# Altium PCB TMS320F280049CPZS.PcbDoc
Units mil, origin at the board's own origin, x right, y up, seen from the top; angles counter-clockwise.
Board outline 1797 x 1626 mil, 4 copper layers (Top Layer, GND, VCC, Bottom Layer); 42 components, 84 nets, 272 pads, 2 vias.
Unrouted connection lines stored in the file: 166.
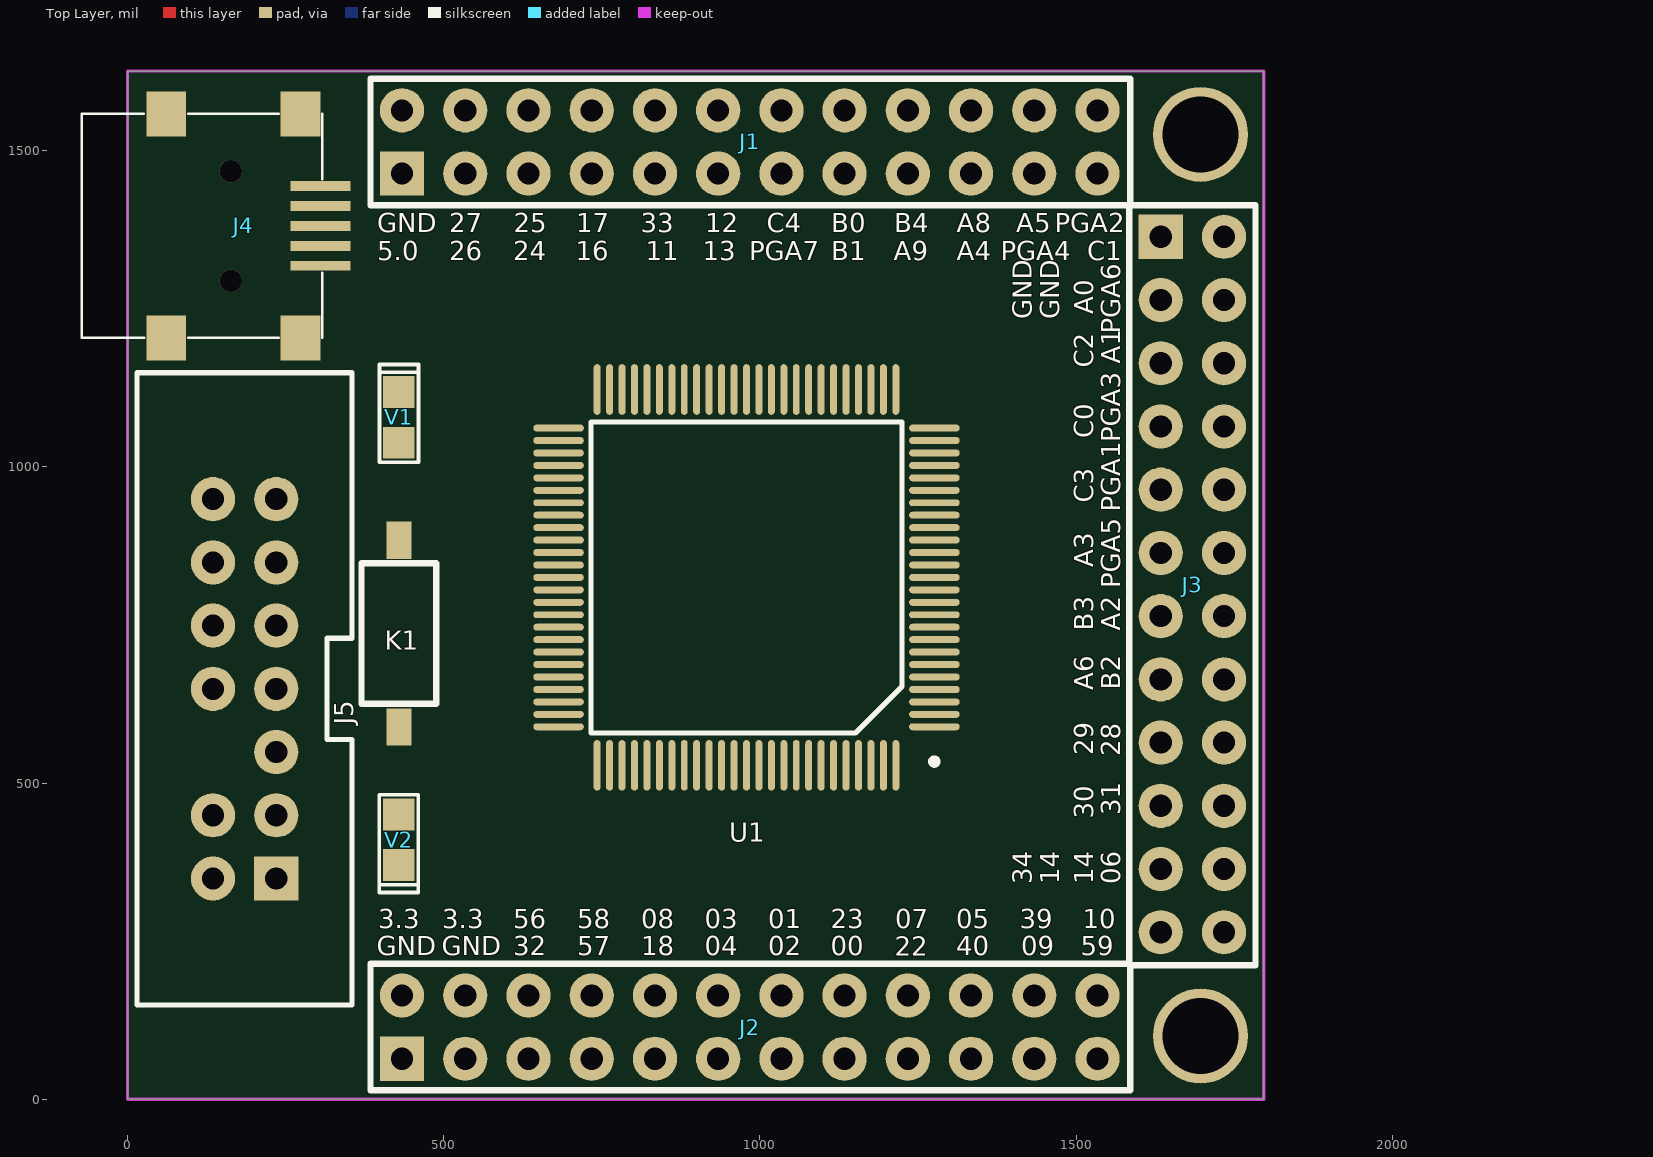
[diagram p0: Top Layer view]
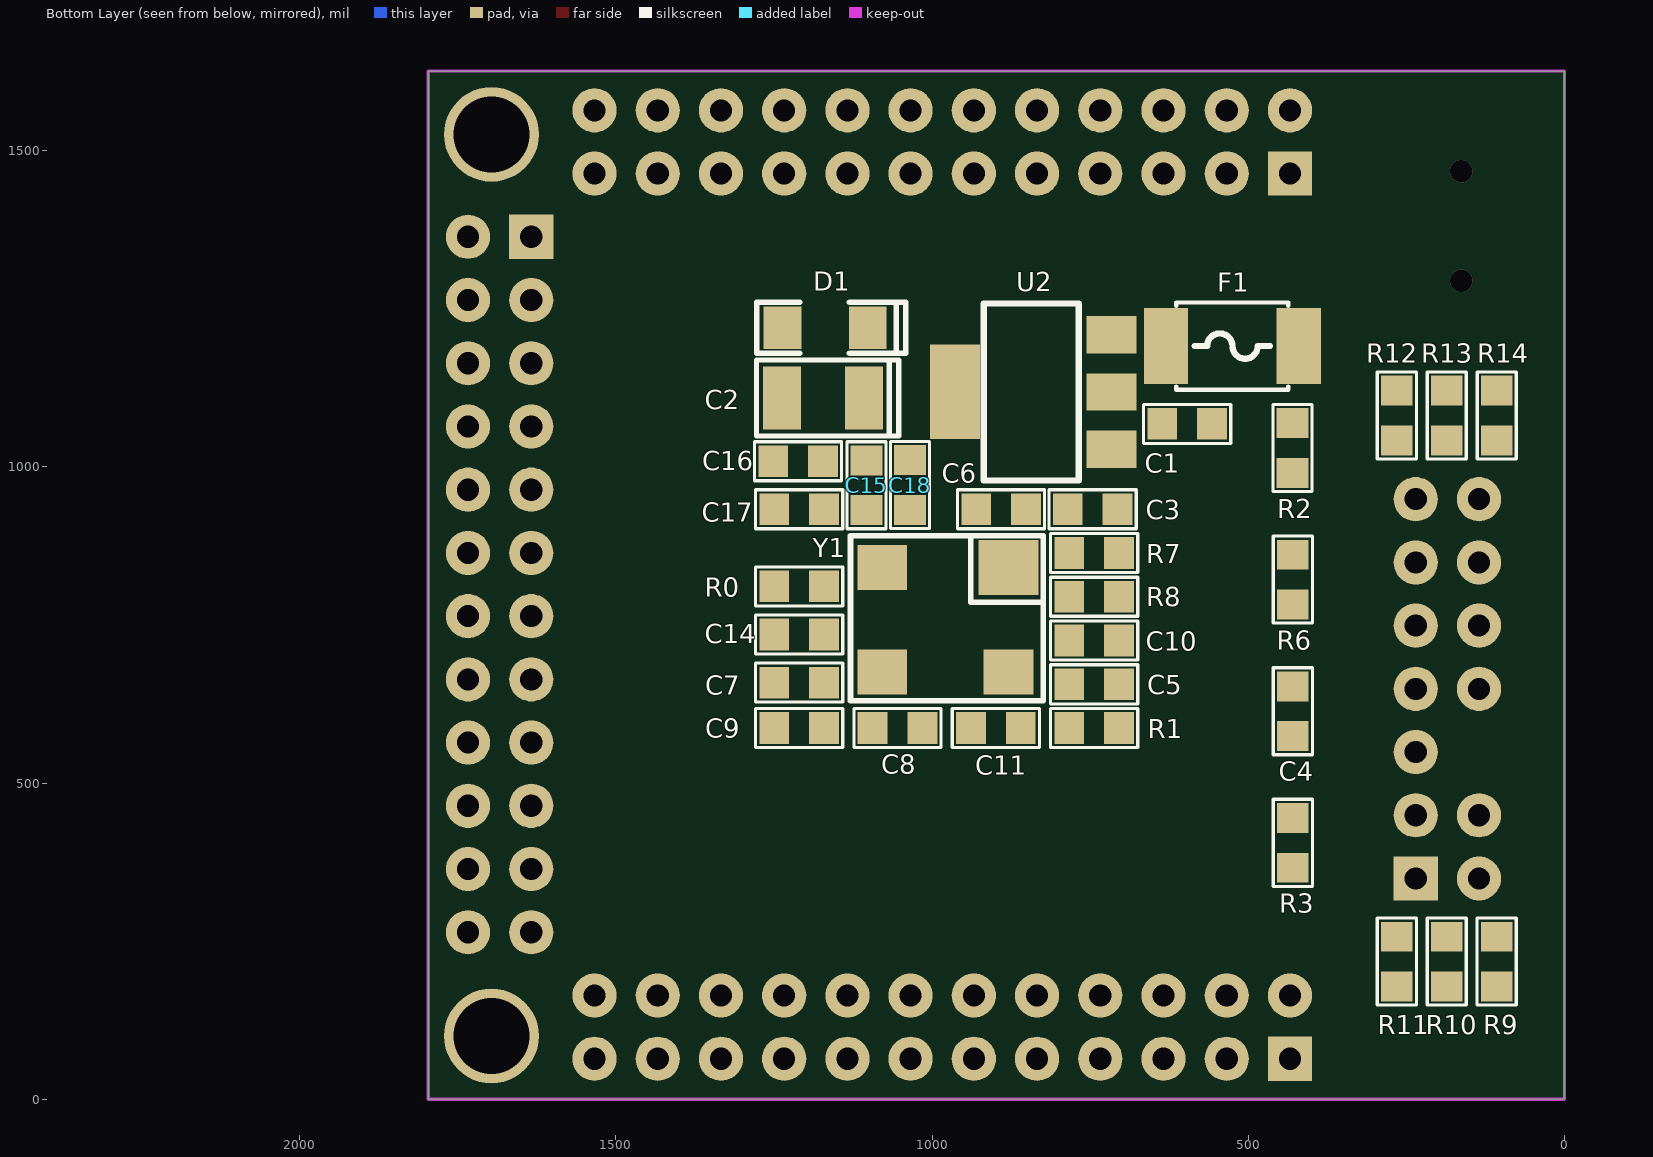
[diagram p1: Bottom Layer view, seen from below]
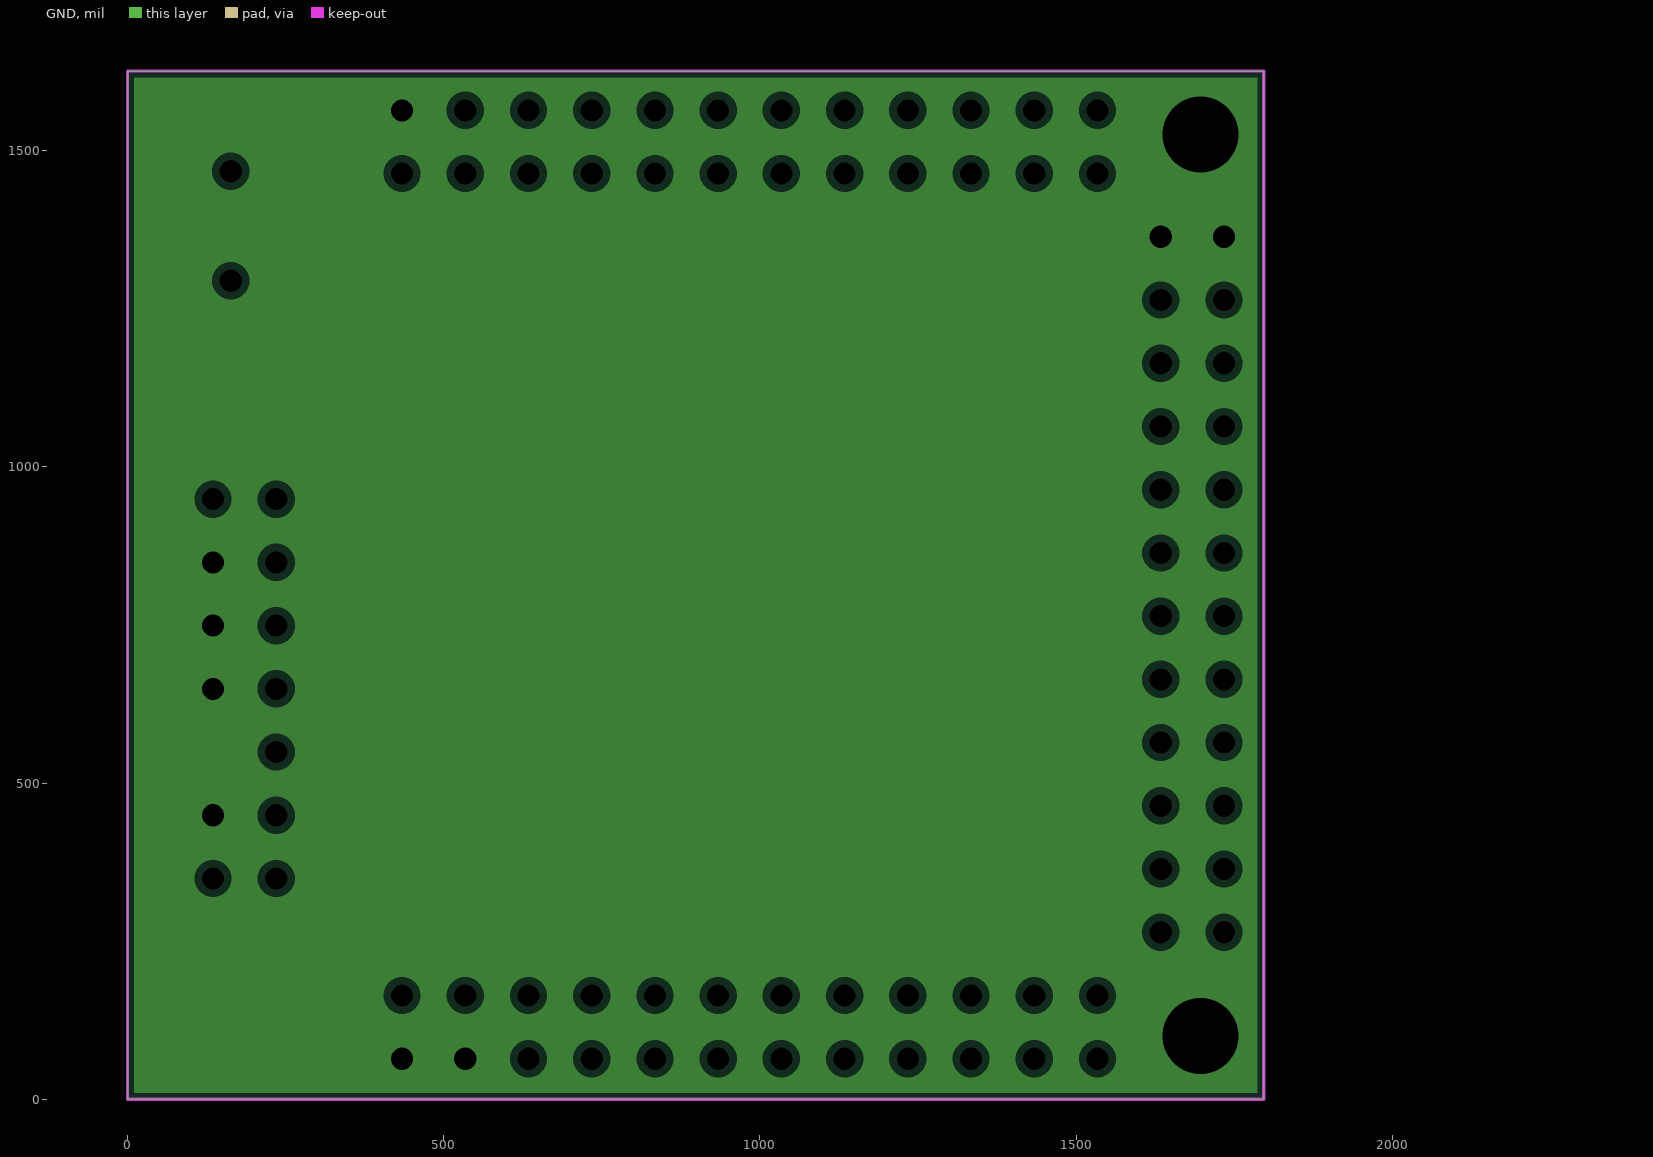
[diagram p2: GND, clearances drawn from the general rule]
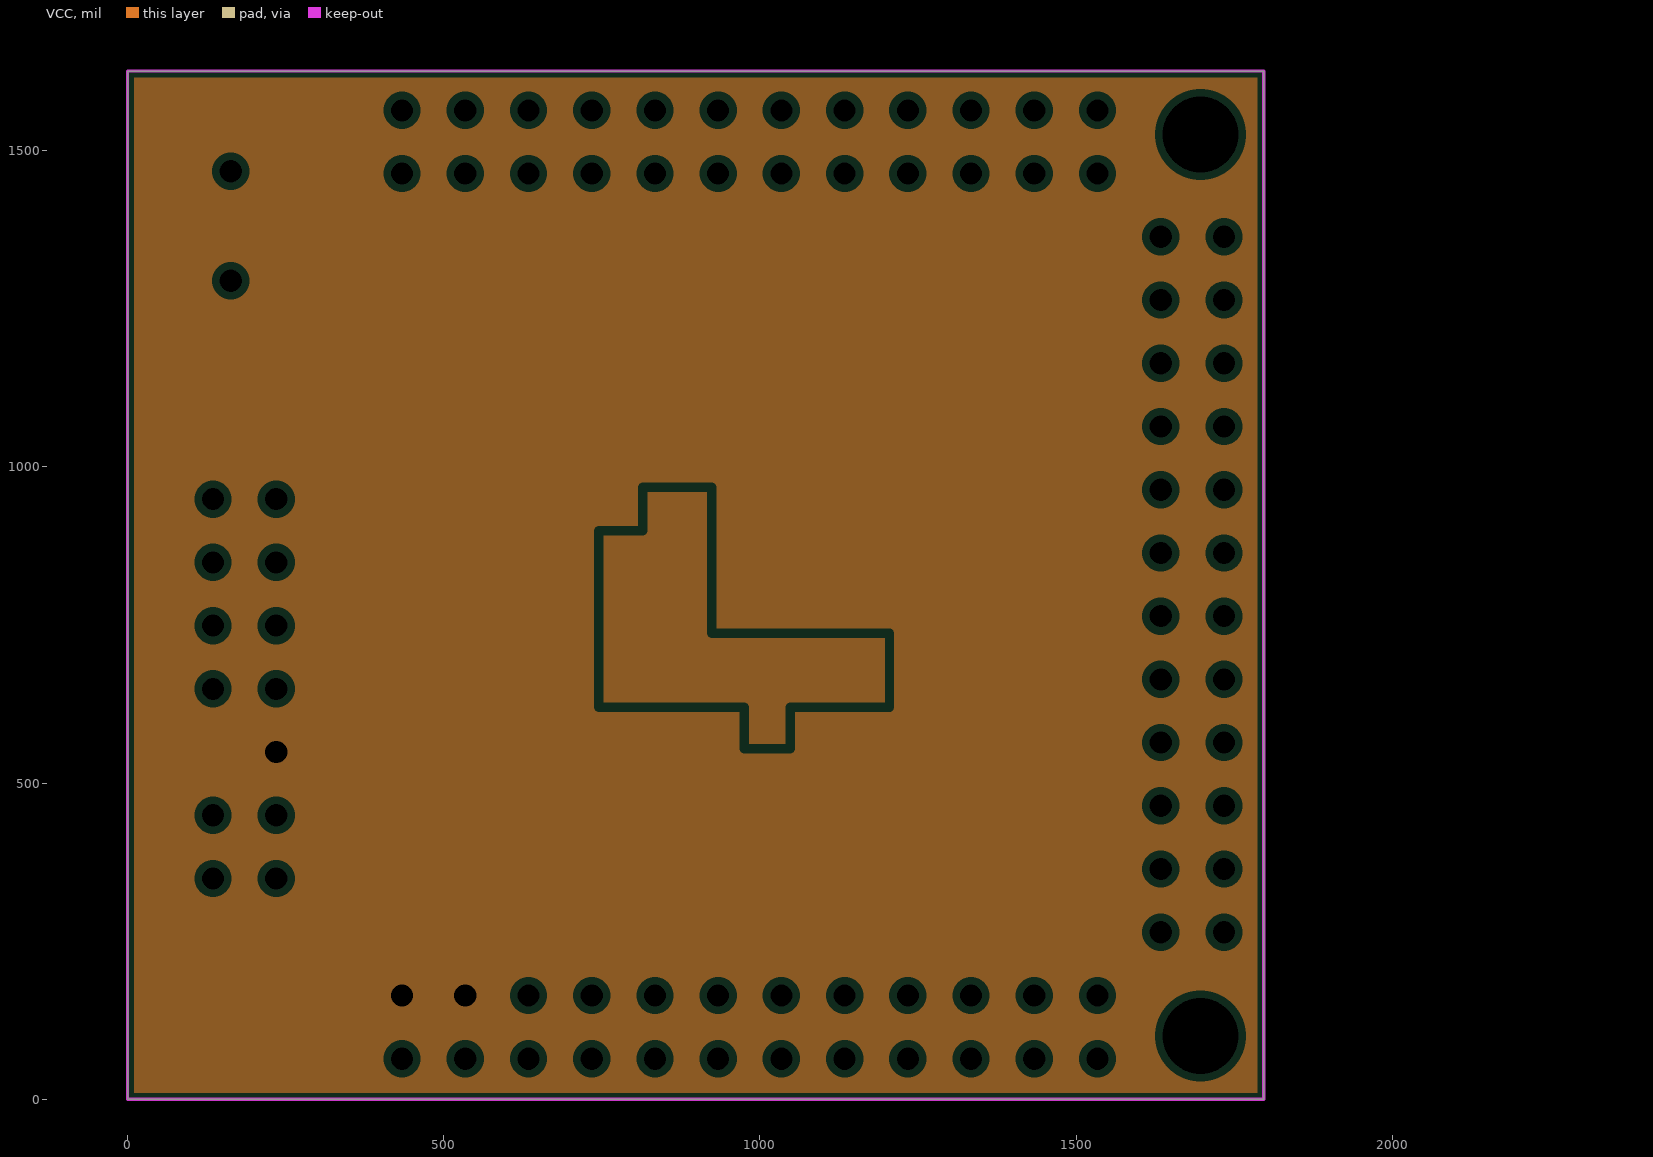
[diagram p3: VCC, clearances drawn from the general rule]

## Layer stack, top to bottom
Top Solder: solder mask 0.4, Solder Resist, Dk 3.5
Top Layer: signal copper 1.4
Dielectric1: core 12.6, FR-4, Dk 4.8
GND: plane copper 1.4
Dielectric2: prepreg 12.6, FR-4, Dk 4.8
VCC: plane copper 1.4
Dielectric3: core 12.6, FR-4, Dk 4.8
Bottom Layer: signal copper 1.4
Bottom Solder: solder mask 0.4, Solder Resist, Dk 3.5

## Board outline
0,0 1797,0 1797,1626 0,1626

## Design rules (kind name [scope] priority, off if disabled: settings)
Clearance [All] p1: gap=7 ignorepadtopadclearanceinfootprint=FALSE except(0: Arc-Hole Track-Hole SMDPad-Hole THPad-Hole Via-Hole Fill-Hole Poly-Hole Region-Hole Text-Hole)
FabricationTestPointUsage TestPointUsage [All] p1: valid=0 allowmultiple=FALSE
FabricationTestpoint Testpoint [All] p1: side=3 testpointundercomponent=TRUE minsize=40 maxsize=100 preferedsize=60 minholesize=0 maxholesize=40 preferedholesize=32 testpointgrid=1 allowsidetop=TRUE allowsidebottom=TRUE usegrid=TRUE gridtolerance=0.01
HoleSize [All] p1: absolutevalues=TRUE maxlimit=1000 minlimit=1 maxpercent=80.000 minpercent=20.000
HoleToHoleClearance [All] p1: gap=0 allowstackedmicrovias=TRUE
MinimumSolderMaskSliver [All] p1: minsoldermaskwidth=0
PlaneClearance [All] p1: clearance=12
PlaneConnect [All] p1: planeconnectstyle=Direct reliefexpansion=20 reliefentries=4 reliefconductorwidth=10 reliefairgap=10
PolygonConnect [All] p1: connectstyle=Direct reliefconductorwidth=30 reliefentries=4 polygonreliefangle="90 Angle" airgapwidth=10
RoutingVias [All] p1: holewidth=17 width=17 viastyle="Through Hole" minholewidth=5 minwidth=10 maxholewidth=50 maxwidth=1000
ShortCircuit [All] p1: allowed=TRUE
SilkToSilkClearance [All] p1: silktosilkclearance=0
SilkToSolderMaskClearance SilkscreenOverComponentPads [IsPad] p1: minsilkscreentomaskgap=0 clearancetoexposedcopper=TRUE
SolderMaskExpansion [All] p1: expansion=2 istentingtop=FALSE
Width [All] p1: maxlimit=100 minlimit=8 preferedwidth=8
20 further rules are at their usual default settings.

## Components (designator, comment, footprint, x,y, rotation, side; value= is the part's Value field where it differs from the comment)
C1 "104" 0805_C_M 637.6,1068 r180 bottom locked
C2 "10uf" CE3528 1107.77,1109 r0 bottom locked
C3 "104" 0805_C_M 787,933 r180 bottom locked
C4 "104" 0805_C_M 429.49,572.58 r90 bottom locked
C5 "10uF" 0805_C_M 784.63,656.2 r180 bottom locked
C6 "10uF" 0805_C_M 849.9,933 r0 bottom locked
C7 "10uF" 0805_C_M 1169.37,658.91 r0 bottom locked
C8 "10uF" 0805_C_M 1013.79,587 r0 bottom locked
C9 "104" 0805_C_M 1169.37,587 r0 bottom locked
C10 "104" 0805_C_M 702.63,725.4 r0 bottom locked
C11 "104" 0805_C_M 858.21,587 r0 bottom locked
C14 "10uF" 0805_C_M 1169.37,734.95 r0 bottom locked
C15 "10uF" 0805_C_M 1103.79,929.99 r90 bottom
C16 "10uF" 0805_C_M 1171,1008.98 r0 bottom locked
C17 "10uF" 0805_C_M 1169.37,933 r0 bottom locked
C18 "104" 0805_C_M 1035,930.37 r90 bottom locked
D1 "7.5V" 1206D 1236.83,1220 r180 bottom locked
F1 "0.5A" 1812F 421,1191.15 r0 bottom locked
J1 "CON24" CON24_2.54 434,1464 r90 top locked
J2 "CON24" CON24_2.54 434,64 r90 top locked
J3 "CON24" CON24_2.54 1634,1364 r0 top locked
J4 "SIP5" MINIUSB-S 310,1445 r180 top locked
J5 "Header 7X2" JTAG14 235,349 r180 top locked (schematic designator JTAG)
K1 "KEY1" KEY2 429,884 r270 top locked (schematic designator RESET)
R0 "0" 0805_R_M 1169.37,811 r0 bottom locked
R1 "0" 0805_R_M 784.63,587 r180 bottom locked
R2 "2.2k" 0805_R_M 430,989.01 r90 bottom locked
R3 "2.2K" 0805_R_M 429.49,364.37 r90 bottom locked
R6 "10K" 0805_R_M 429.49,862.8 r270 bottom locked
R7 "10K" 0805_R_M 784.63,863.8 r180 bottom locked
R8 "10K" 0805_R_M 702.63,794.6 r0 bottom locked
R9 "10K" 0805_R_M 107,258.63 r270 bottom locked
R10 "10K" 0805_R_M 186,258.63 r270 bottom locked
R11 "10K" 0805_R_M 265,258.63 r270 bottom locked
R12 "10K" 0805_R_M 265,1040.37 r90 bottom locked
R13 "10K" 0805_R_M 186,1040.37 r90 bottom locked
R14 "10K" 0805_R_M 107,1040.37 r90 bottom locked
U1 "TMS320F280049CPZS" STM32F407VGT6 1276.05,589 r180 top locked
U2 "AMS1117-3.3" LM1117 716.1,1029 r90 bottom locked
V1 "LED" 0805D 429.1,1038.5 r90 top locked (schematic designator LED)
V2 "LED2" 0805D 429,450.34 r270 top locked (schematic designator LED2)
Y1 "20M" OSC5070 879,841 r0 bottom locked

## Footprints (in the part's own frame and the unit in brackets; to place one, negate y for a bottom-side part, rotate by r counter-clockwise, add the part's x,y. Pads: shape width x height; smd on the part's side, far side on the other; paste and mask are expansions set on the pad)
0805_C_M [mm]
  rect 1.2x1.27 smd mask+0.051: 1(0.041,0) 2(2.041,0)
  silkscreen extent -0.71,-0.78 2.79,0.78, body extent -0.01,-0.65 2.09,0.65, height 1.1
0805_R_M [mm]
  rect 1.2x1.27 smd mask+0.051: 1(0.041,0) 2(2.041,0)
  silkscreen extent -0.71,-0.78 2.79,0.78, body extent -0.01,-0.65 2.09,0.65, height 0.51
0805D [mil]
  rect 50x50 smd mask+2: 1(0,0) 2(80,0)
  silkscreen extent -31,-31 124,31, body extent -7,-25 87,25, height 39
1206D [mil]
  rect 60x66.93 smd: 1(0,0) 2(135,0)
  silkscreen extent -40,-40 195,40, body extent 0,-37 130,37, height 63
1812F [mil]
  rect 70x120 smd mask+3: 1(-1,0) 2(209,0)
  silkscreen extent 15,-69 193,69, body extent -11,-69 222,68, height 43
CE3528 [mil]
  rect 60x100 smd: 1(0,0) 2(130,0)
  silkscreen extent -55,-60 170,60
CON24_2.54 [mil]
  rect 70x70 hole 35: 1(0,0)
  round 70 hole 35: 2(0,-100) 3(0,-200) 4(0,-300) 5(0,-400) 6(0,-500) 7(0,-600) 8(0,-700) 9(0,-800) 10(0,-900) 11(0,-1000) 12(0,-1100) 13(100,0) 14(100,-100) 15(100,-200) 16(100,-300) 17(100,-400) 18(100,-500) 19(100,-600) 20(100,-700) 21(100,-800) 22(100,-900) 23(100,-1000) 24(100,-1100)
  silkscreen extent -50,-1152 150,50
JTAG14 [mil]
  rect 70x70 hole 35: 1(0,0)
  round 70 hole 35: 2(100,0) 3(0,-100) 4(100,-100) 5(0,-200) 7(0,-300) 8(100,-300) 9(0,-400) 10(100,-400) 11(0,-500) 12(100,-500) 13(0,-600) 14(100,-600)
  silkscreen extent -120,-800 220,200, body extent -125,-803 224,204, height 315
KEY2 [mm]
  rect 1.5x1 smd mask+0.051: 1(0,0) 2(7.5,0)
  silkscreen extent 0.92,-1.5 6.57,1.5, body extent 0.92,-1.51 6.59,1.55, height 2.55
LM1117 [mil]
  rect 59x79 smd: 1(-1,0) 2(89.55,0) 3(180.1,0)
  rect 150x79 smd: 4(90,248)
  silkscreen extent -50,52 230,202, body extent -53,-16 230,269, height 50
MINIUSB-S [mm]
  rect 1.6x1.8 smd: 0(0.925,6.121) 0(0.925,-2.879) 0(6.325,6.121) 0(6.325,-2.879)
  rect 2.4x0.4 smd: 1(0.125,0.021) 2(0.125,0.821) 3(0.125,1.621) 4(0.125,2.421) 5(0.125,3.221)
  silkscreen extent 0.05,-2.88 9.72,6.12, body extent 0.03,-2.9 9.73,6.15, height 5
OSC5070 [mm]
  rect 2.4x2.2 smd: 1(0,0)
  rect 2x1.8 smd: 2(5.08,0) 3(5.08,4.2) 4(0,4.2)
  silkscreen extent -1.4,-1.27 6.35,5.36, body extent -1.27,-1.27 6.35,5.33, height 0.35
STM32F407VGT6 [mil]
  oval 80x11 smd: 1(0,0) 2(0,-19.69) 3(0,-39.37) 4(0,-59.06) 5(0,-78.74) 6(0,-98.43) 7(0,-118.11) 8(0,-137.8) 9(0,-157.48) 10(0,-177.17) 11(0,-196.85) 12(0,-216.54) 13(0,-236.22) 14(0,-255.91) 15(0,-275.59) 16(0,-295.28) 17(0,-314.96) 18(0,-334.65) 19(0,-354.33) 20(0,-374.02) 21(0,-393.7) 22(0,-413.39) 23(0,-433.07) 24(0,-452.76) 25(0,-472.44) 51(594.49,-472.44) 52(594.49,-452.76) 53(594.49,-433.07) 54(594.49,-413.39) 55(594.49,-393.7) 56(594.49,-374.02) 57(594.49,-354.33) 58(594.49,-334.65) 59(594.49,-314.96) 60(594.49,-295.28) 61(594.49,-275.59) 62(594.49,-255.91) 63(594.49,-236.22) 64(594.49,-216.54) 65(594.49,-196.85) 66(594.49,-177.17) 67(594.49,-157.48) 68(594.49,-137.8) 69(594.49,-118.11) 70(594.49,-98.43) 71(594.49,-78.74) 72(594.49,-59.06) 73(594.49,-39.37) 74(594.49,-19.69) 75(594.49,0)
  oval 11x80 smd: 26(61.02,-533.46) 27(80.71,-533.46) 28(100.39,-533.46) 29(120.08,-533.46) 30(139.76,-533.46) 31(159.45,-533.46) 32(179.13,-533.46) 33(198.82,-533.46) 34(218.5,-533.46) 35(238.19,-533.46) 36(257.87,-533.46) 37(277.56,-533.46) 38(297.24,-533.46) 39(316.93,-533.46) 40(336.61,-533.46) 41(356.3,-533.46) 42(375.98,-533.46) 43(395.67,-533.46) 44(415.35,-533.46) 45(435.04,-533.46) 46(454.72,-533.46) 47(474.41,-533.46) 48(494.09,-533.46) 49(513.78,-533.46) 50(533.46,-533.46) 76(533.46,61.02) 77(513.78,61.02) 78(494.09,61.02) 79(474.41,61.02) 80(454.72,61.02) 81(435.04,61.02) 82(415.35,61.02) 83(395.67,61.02) 84(375.98,61.02) 85(356.3,61.02) 86(336.61,61.02) 87(316.93,61.02) 88(297.24,61.02) 89(277.56,61.02) 90(257.87,61.02) 91(238.19,61.02) 92(218.5,61.02) 93(198.82,61.02) 94(179.13,61.02) 95(159.45,61.02) 96(139.76,61.02) 97(120.08,61.02) 98(100.39,61.02) 99(80.71,61.02) 100(61.02,61.02)
  silkscreen extent -5,-482 543,60, body extent 22,-512 573,39, height 63

## Part data
C1 C3 C4 C5 C6 C7 C8 C9 C10 C11 C14 C15 C16 C17 C18: library part C3
C2: library part E3
D1 V1: library part LED2
F1: library part FUSE1
J2 J3: library part SIP18
J5: "Header, 7-Pin, Dual row"
R0 R1 R2 R3 R6 R7 R8 R9 R10 R11 R12 R13 R14: library part R3
U1: library part TMS320F280049
U2: library part 1117
Y1: library part CY2_有源

## Free pads (board coordinates)
  round 150 hole 120: 1(1697,100) 1(1697,1526)

## Via types
v1: diameter 35.43, hole 35.43, Top Layer to Bottom Layer, 2 vias

## Nets (pads, with @x,y where several pads share a name; then routed paths per layer and width w, separated by ;. In a path a pad name is that pad's centre, name@x,y a point inside that pad or via, vN(x,y) a via of type N, cw(c..) or ccw(c..) an arc to the next point about the centre after c; other vN are vias at no path point)
A0: J3.2 U1.23
A1: J3.15 U1.22
A2: J3.19 U1.9
A3: J3.6 U1.10
A4: J1.10 U1.36
A5: J1.23 U1.35
A6: J3.8 U1.6
A8: J1.22 U1.37
A9: J1.9 U1.38
B0: J1.20 U1.41
B1: J1.8 U1.40
B2: J3.20 U1.7
B3: J3.7 U1.8
B4: J1.21 U1.39
C0: J3.4 U1.19
C1: J1.12 U1.29
C2: J3.3 U1.21
C3: J3.5 U1.17
C4: J1.19 U1.44
DV5: F1.1 J1.1 J4.1
EMU0: J5.13 R13.1
EMU1: J5.14 R14.1
GND: C1.2 C2.2 C3.2 C4.1 C5.2 C6.2 C7.2 C8.2 C9.2 C10.2 C11.2 C14.2 C15.2 C16.2 C17.2 C18.1 D1.1 J1.13 J2.1 J2.2 J3.1 J3.13 J4.4 J4.5 J5.4 J5.8 J5.10 J5.12 K1.2 pad.1 R1.2 R9.2 U1.5 U1.12 U1.13 U1.14 U1.15 U1.26 U1.27 U1.32 U1.33 U1.42 U1.45 U1.72 U1.82 U1.86 U2.1 V1.2 Y1.2
GPIO00: J2.8 U1.79
GPIO01: J2.19 U1.78
GPIO02: J2.7 U1.77
GPIO03: J2.18 U1.76
GPIO04: J2.6 U1.75
GPIO05: J2.22 U1.89
GPIO06: J3.23 U1.97
GPIO07: J2.21 U1.84
GPIO08: J2.17 U1.74
GPIO09: J2.11 U1.90
GPIO10: J2.24 U1.93
GPIO11: J1.5 U1.52
GPIO12: J1.18 U1.51
GPIO13: J1.6 U1.50
GPIO14: J3.11 U1.96
GPIO15: J3.24 U1.95
GPIO16: J1.4 U1.54
GPIO17: J1.16 U1.55
GPIO18: J2.5 U1.68
GPIO22: J2.9 U1.83
GPIO23: J2.20 U1.81
GPIO24: J1.3 R7.1 U1.56
GPIO25: J1.15 U1.57
GPIO26: J1.2 U1.58
GPIO27: J1.14 U1.59
GPIO28: J3.21 U1.1
GPIO29: J3.9 U1.100
GPIO30: J3.10 U1.98
GPIO31: J3.22 U1.99
GPIO32: J2.3 R8.2 U1.64 V2.2
GPIO33: J1.17 U1.53
GPIO34: J3.12 U1.94
GPIO39: J2.23 U1.91
GPIO40: J2.10 U1.85
GPIO56: J2.15 U1.65
GPIO57: J2.4 U1.66
GPIO58: J2.16 U1.67
GPIO59: J2.12 U1.92
NetC1_1: C1.1 D1.2 F1.2 U2.3
NetC5_1: C5.1 C6.1 C7.1 C8.1 U1.4 U1.46 U1.71 U1.87
NetC14_1: C14.1 C15.1 R0.1 U1.11 U1.34
NetC16_1: C16.1 U1.25
NetC17_1: C17.1 U1.24
NetR1_1: R1.1 U1.73
NetR2_2: R2.2 V1.1
NetR3_2: R3.2 V2.1
NetU1_69: U1.69 Y1.3
PGA1: J3.17 U1.18
PGA2: J1.24 U1.30
PGA3: J3.16 U1.20
PGA4: J1.11 U1.31
PGA5: J3.18 U1.16
PGA6: J3.14 U1.28
PGA7: J1.7 U1.43
REST: C4.2 K1.1 R6.2 U1.2
TCK: J5.9 J5.11 R12.1 U1.60
TDI: J5.3 R11.1 U1.63
TDO: J5.7 U1.61
TMS: J5.1 R10.1 U1.62
TRSTN: J5.2 R9.1
VDD3.3: C2.1 C3.1 C9.1 C10.1 C11.1 C18.2 J2.13 J2.14 J5.5 R0.2 R2.1 R3.1 R6.1 R7.2 R8.1 R10.2 R11.2 R12.2 R13.2 R14.2 U1.3 U1.47 U1.70 U1.80 U1.88 U2.4 Y1.4
pads on no net: J4.0 J4.2 J4.3 U1.48 U1.49 U2.2 Y1.1
copper on no net:
  other v1: 163.36,1294.55 163.36,1467.78

## Polygon pours and split planes (outlines as drawn)
GND on GND (split plane): 1786.91,10.09 10.09,10.09 10.09,1615.91 1786.91,1615.91
NetC5_1 on VCC (split plane): 916.44,737 916.69,735.04 917.45,733.22 918.65,731.65 920.22,730.45 922.04,729.69 924,729.44 1197.44,729.44 1197.44,627.56 1048,627.56 1046.04,627.31 1044.22,626.55 1042.65,625.35 1041.45,623.78 1040.69,621.96 1040.44,620 1040.44,561.56 982.56,561.56 982.56,620 982.31,621.96 981.55,623.78 980.35,625.35 978.78,626.55 976.96,627.31 975,627.56 752.56,627.56 752.56,891.44 815,891.44 816.96,891.69 818.78,892.45 820.35,893.65 821.55,895.22 822.31,897.04 822.56,899 822.56,960.44 916.44,960.44
VDD3.3 on VCC (split plane): 1786.91,10.09 10.09,10.09 10.09,1615.91 1786.91,1615.91

## Keep-outs
Keep-Out Layer:
  the board outline again, w5

## Other copper
Bottom Layer:
  pour cut-out: 2245.67,1644.29 2245.67,1554.79 2245.07,1554.19 2245.07,1551.59 2345.27,1551.59 2345.27,1644.29
  pour cut-out: 825,891 1128,891 1128,630 825,630
  pour cut-out: 438,1266 437.5,1119 614.5,1119 614.5,1266
VCC (plane layer: these items are gaps in the copper):
  lines w15: 745,620 975,620 975,554 1048,554 1048,620 1205,620 1205,737 924,737 924,968 815,968 815,899 745,899 745,620

## Silkscreen, mask and mechanical layers (free items; w line width, h text height)
Top Overlay:
  text "GND" at 394.63,1371 h30
  text "27" at 508.63,1371 h30
  text "25" at 610.63,1371 h30
  text "17" at 709.63,1371 h30
  text "33" at 811.63,1371 h30
  text "12" at 913.63,1371 h30
  text "C4" at 1010.63,1371 h30
  text "B0" at 1112.63,1371 h30
  text "B4" at 1212.44,1371 h30
  text "A8" at 1311.63,1371 h30
  text "A5" at 1405.63,1371 h30
  text "PGA2" at 1466,1371 h30
  text "5.0" at 394.63,1326.81 h30
  text "26" at 508.63,1326.81 h30
  text "24" at 609.82,1326.81 h30
  text "16" at 709,1327 h30
  text "11" at 819.19,1326.81 h30
  text "13" at 909.38,1326.81 h30
  text "PGA7" at 983.57,1326.81 h30
  text "B1" at 1112.76,1326.81 h30
  text "A9" at 1211.94,1326.81 h30
  text "A4" at 1311.63,1326.81 h30
  text "PGA4" at 1381,1327 h30
  text "C1" at 1517.51,1326.81 h30
  text "A0" at 1527.37,1241.63 h30 r90
  text "GND" at 1430.37,1233.63 h30 r90
  text "GND" at 1473.37,1233.82 h30 r90
  text "PGA6" at 1570,1211 h30 r90
  text "A1" at 1570,1163 h30 r90
  text "C2" at 1527.37,1156.63 h30 r90
  text "C0" at 1527.37,1045.63 h30 r90
  text "PGA3" at 1570.37,1039.13 h30 r90
  text "C3" at 1527.37,943.44 h30 r90
  text "PGA1" at 1570,929 h30 r90
  text "A3" at 1527.37,841.63 h30 r90
  text "PGA5" at 1570.37,807.76 h30 r90
  text "B3" at 1527.37,740.63 h30 r90
  text "A2" at 1570.37,740.57 h30 r90
  text "A6" at 1527.37,646.63 h30 r90
  text "B2" at 1570.37,647.38 h30 r90
  text "29" at 1527.37,543.63 h30 r90
  text "28" at 1570.37,542.19 h30 r90
  text "31" at 1570.37,449.01 h30 r90
  text "30" at 1527.37,443.63 h30 r90
  text "34" at 1430.37,339.63 h30 r90
  text "14" at 1473.37,339.82 h30 r90
  text "14" at 1527.37,339.63 h30 r90
  text "06" at 1570.37,339.82 h30 r90
  text "3.3" at 396,270 h30
  text "3.3" at 498,270 h30
  text "56" at 610,270 h30
  text "58" at 711.38,270 h30
  text "08" at 812.56,270 h30
  text "03" at 912.75,270 h30
  text "01" at 1013,270 h30
  text "23" at 1112,270 h30
  text "07" at 1213.81,270 h30
  text "05" at 1310.5,270 h30
  text "39" at 1411,270 h30
  text "10" at 1511,270 h30
  text "GND" at 394,228 h30
  text "GND" at 497,228 h30
  text "32" at 610,228 h30
  text "57" at 711.38,228 h30
  text "18" at 812.56,228 h30
  text "04" at 912.75,228 h30
  text "02" at 1012.94,228 h30
  text "00" at 1112.12,228 h30
  text "40" at 1310.5,228 h30
  text "09" at 1413.69,228 h30
  text "59" at 1507.88,228 h30
  text "22" at 1213.31,226.82 h30